# Altium PCB pphat.PcbDoc
Units mm, origin at the board's own origin, x right, y up, seen from the top; angles counter-clockwise.
Board outline 85 x 56 mm, 2 copper layers (Top Layer, Bottom Layer), stack 1.571 mm thick; 20 components, 13 nets, 111 pads, 8 vias.
Unrouted connection lines stored in the file: 29.
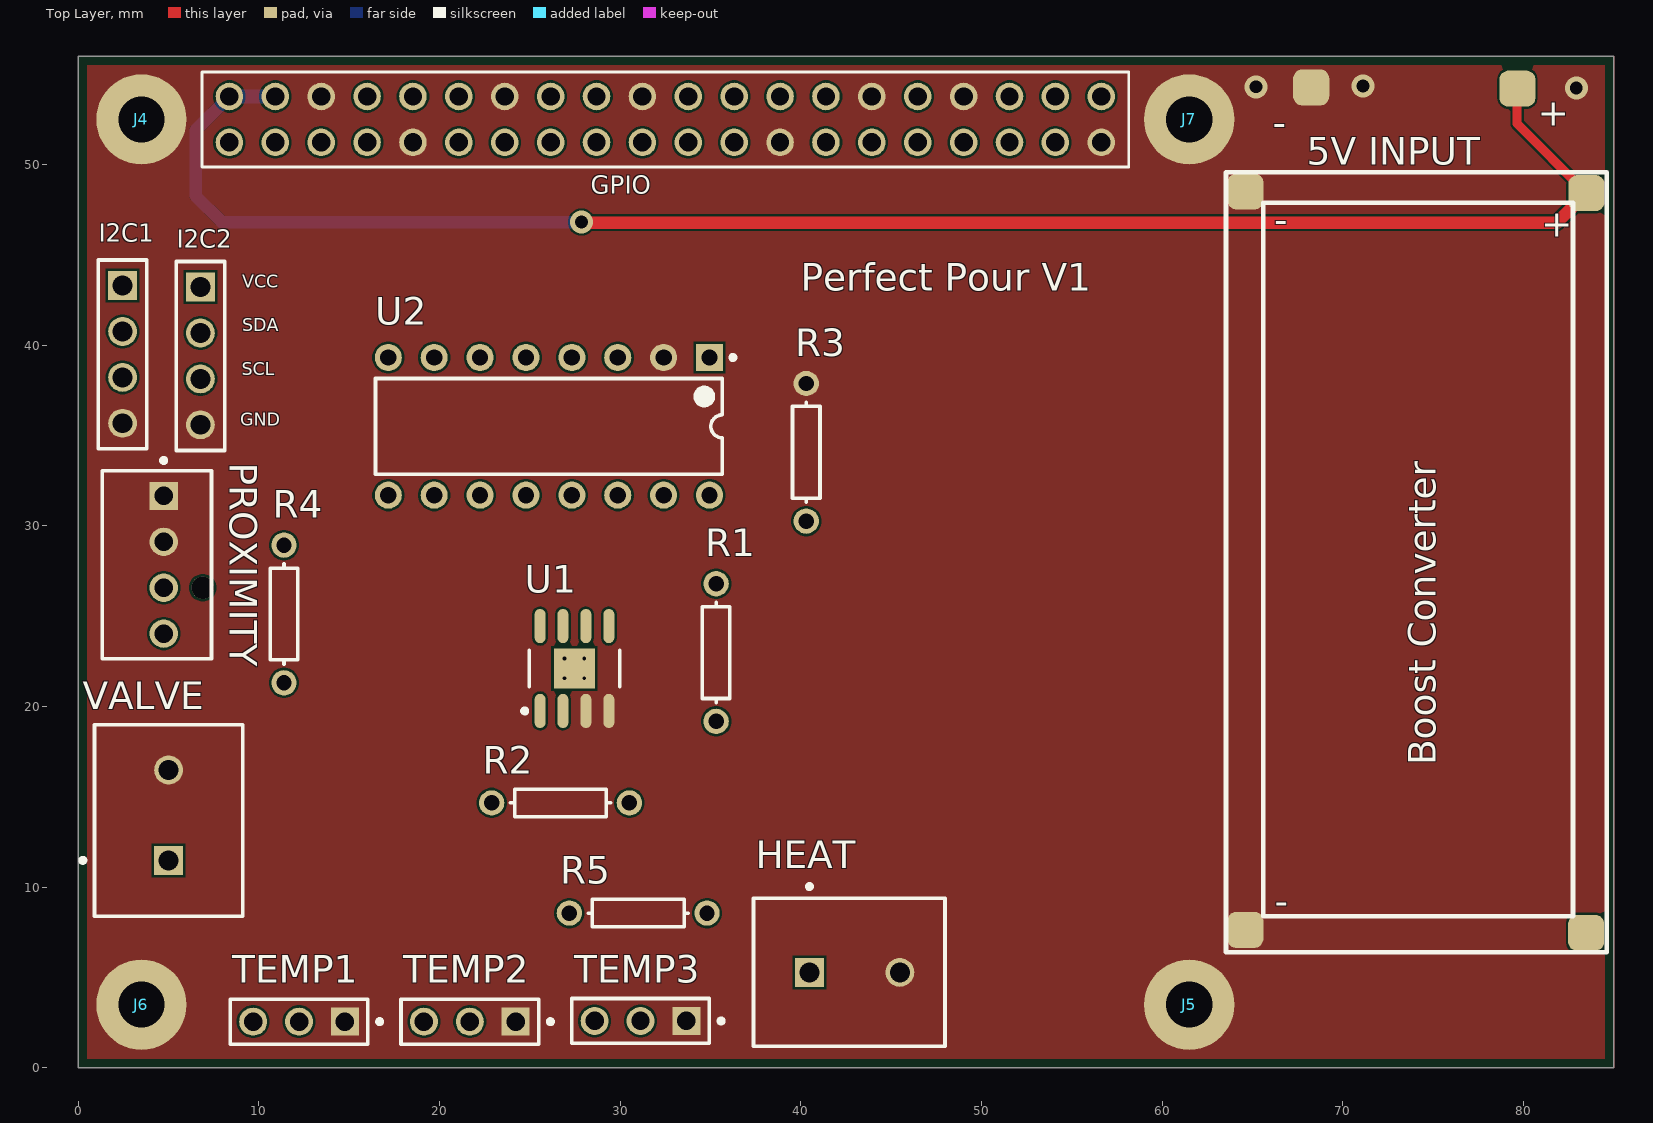
[diagram p0: Top Layer view]
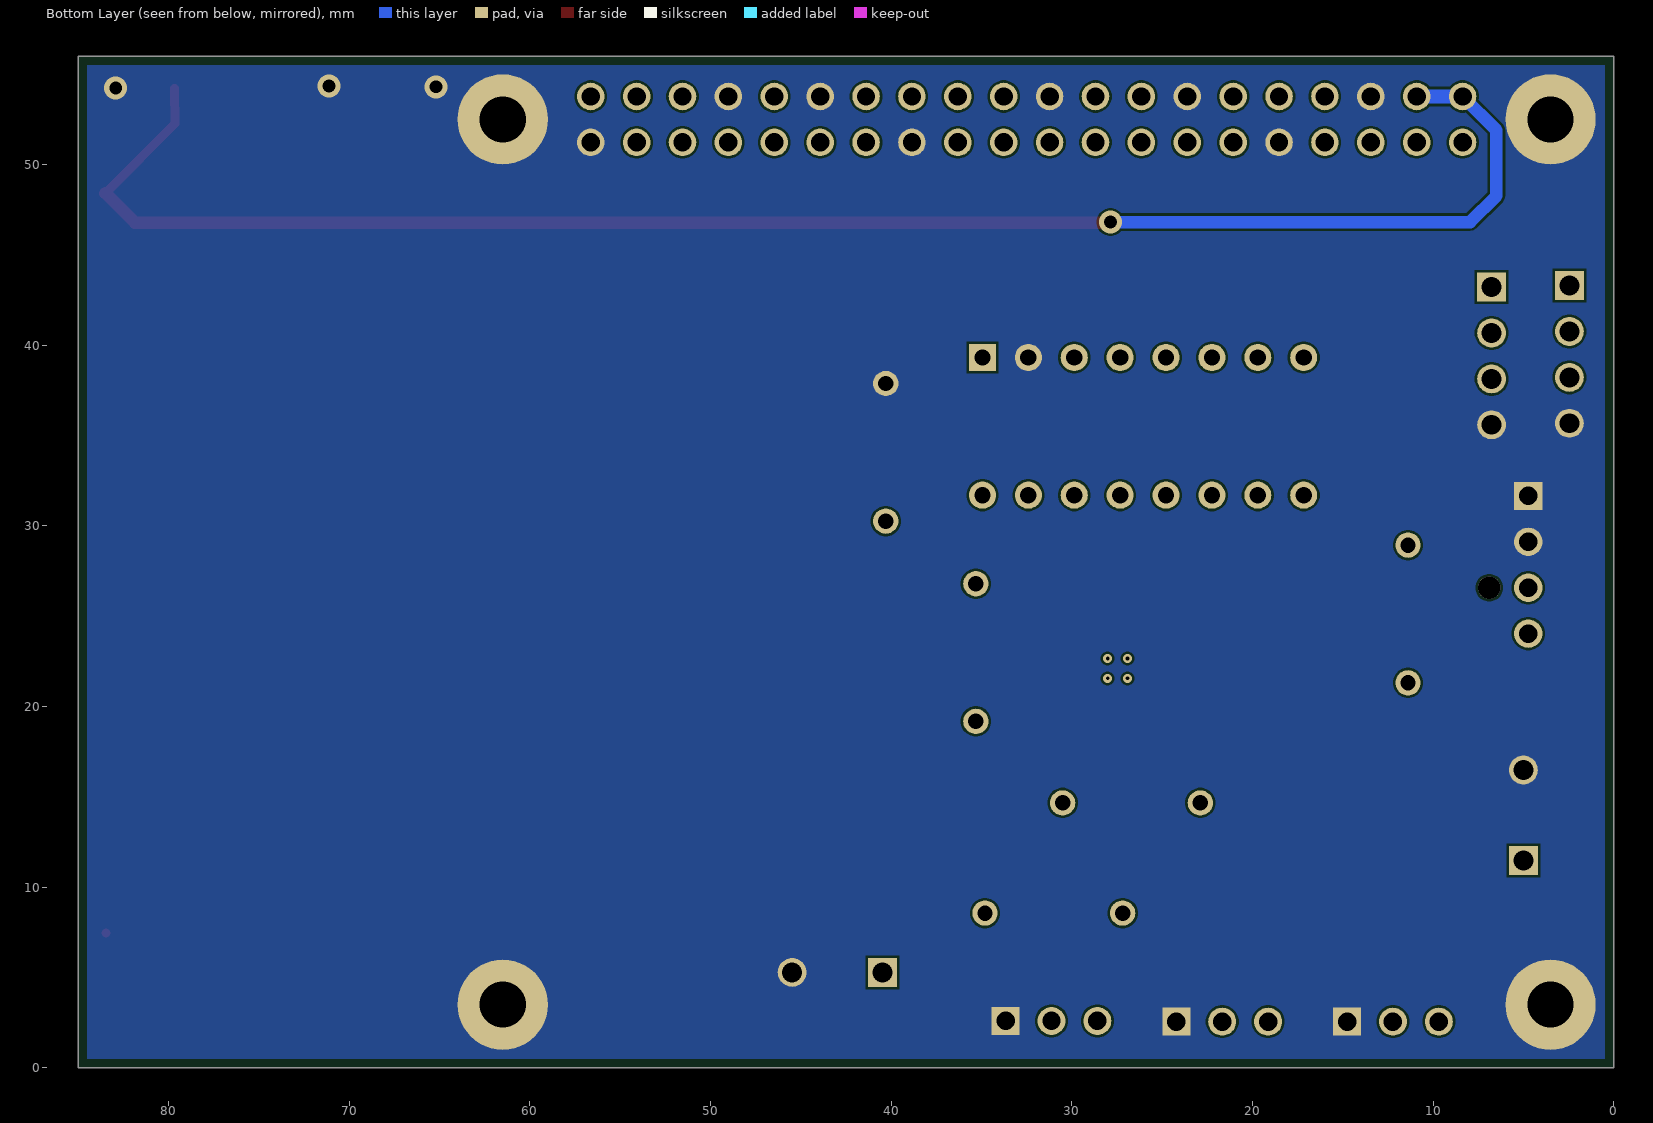
[diagram p1: Bottom Layer view, seen from below]

## Layer stack, top to bottom
Top Solder: solder mask 0.0102, Solder Resist, Dk 3.5
Top Layer: signal copper 0.0356
Dielectric3: core 1.5, Core-025, Dk 4.6
Bottom Layer: signal copper 0.0356
Bottom Solder: solder mask 0.0102, Solder Resist, Dk 3.5

## Board outline
0,0 0,56 85,56 85,0

## Design rules (kind name [scope] priority, off if disabled: settings)
BoardOutlineClearance [All] p1: gap=0.5 ignorepadtopadclearanceinfootprint=FALSE
Clearance "Board outline" [All vs OnLayer('Keep-Out Layer')] p1: gap=0 ignorepadtopadclearanceinfootprint=TRUE
Clearance Default [All] p2: gap=0.127 ignorepadtopadclearanceinfootprint=TRUE
ComponentClearance ComponentClearance_RS1 [InComponent('RS1') vs InComponent('L2')] p1: gap=0 collisioncheckmode=3 verticalgap=0 showdistances=FALSE
ComponentClearance ComponentClearance_J6 [InComponent('J6') vs InComponent('L4')] p2: gap=0 collisioncheckmode=3 verticalgap=0 showdistances=FALSE
ComponentClearance [All] p3: gap=0.25 collisioncheckmode=3 verticalgap=0.254 showdistances=FALSE
DiffPairsRouting [InDifferentialPairClass('All Differential Pairs')] p1: maxlimit=0.25 minlimit=0.127 mostfreqgap=0.243 toplayer_minwidth=0.075 toplayer_maxwidth=0.25 toplayer_prefwidth=0.25 bottomlayer_minwidth=0.075 bottomlayer_maxwidth=0.25 bottomlayer_prefwidth=0.25 impedanceprofiledriven=TRUE maxuncoupledlength=12.7
HoleSize [All] p1: absolutevalues=TRUE maxlimit=10 minlimit=0.254 maxpercent=80.000 minpercent=20.000
HoleToHoleClearance [All] p1: gap=0.1 allowstackedmicrovias=TRUE
MatchedLengths [All] p1: tolerance=1 checknetsindiffpair=TRUE checkdiffpairvsdiffpair=FALSE checkxsignals=FALSE checkothers=FALSE
MinimumSolderMaskSliver [All] p1: minsoldermaskwidth=0.1
PasteMaskExpansion [All] p1: expansion=-0.1
PolygonConnect [All] p1: connectstyle=Direct reliefconductorwidth=0.254 reliefentries=4 polygonreliefangle="90 Angle" airgapwidth=0.254
RoutingVias [All] p1: holewidth=0.254 width=0.508 viastyle="Through Hole" minholewidth=0.254 minwidth=0.508 maxholewidth=0.5 maxwidth=1
SilkToSilkClearance [All] p1 off: silktosilkclearance=0.254
SilkToSolderMaskClearance [IsPad] p1 off: minsilkscreentomaskgap=0.254 clearancetoexposedcopper=TRUE
SolderMaskExpansion [All] p1: expansion=0.05 istentingtop=FALSE
Width [All] p1: maxlimit=6.8 minlimit=0.127 preferedwidth=0.2 minimp=50.000000 maximp=50.000000 favimp=50.000000
22 further rules are at their usual default settings.

## Components (designator, comment, footprint, x,y, rotation, side; value= is the part's Value field where it differs from the comment)
GPIO "GPIO 2x20" GPIO2x20 32.5,52.5 r0 top locked
HEAT "282836-2" TECO-282836-2_V 42.979,5.287 r0 top
I2C1 "61300411121" 61300411121 2.459,39.492 r270 top
I2C2 "61300411121" 61300411121 6.761,39.408 r270 top
J4 "M2.5" "M2.5 Drill Hole" 3.5,52.5 r0 top locked
J5 "M2.5" "M2.5 Drill Hole" 61.5,3.5 r0 top locked
J6 "M2.5" "M2.5 Drill Hole" 3.5,3.5 r0 top locked
J7 "M2.5" "M2.5 Drill Hole" 61.5,52.5 r0 top locked
PROXIMITY "47053-3000" FP-47053-3000-MFG 4.355,27.849 r90 top
R1 "Res1" AXIAL-0.3 35.312,22.99 r90 top value=10K
R2 "Res1" AXIAL-0.3 26.699,14.667 r0 top value=10K
R3 "Res1" AXIAL-0.3 40.299,34.076 r90 top value=10K
R4 "Res1" AXIAL-0.3 11.39,25.126 r90 top value=10K
R5 "Res1" AXIAL-0.3 30.998,8.569 r0 top value=10K
TEMP1 "22-28-4033" MOLX-22-28-4033_V 12.225,2.559 r180 top
TEMP2 "22-28-4033" MOLX-22-28-4033_V 21.675,2.559 r180 top
TEMP3 "22-28-4033" MOLX-22-28-4033_V 31.126,2.598 r180 top
U1 "AD8099ARDZ" ADI-RD-8-1_L 27.469,22.109 r90 top
U2 "DAC0808LCN" NFG0016A 26.055,35.512 r270 top
VALVE "282836-2" TECO-282836-2_V 5.005,13.987 r90 top

## Footprints (in the part's own frame and the unit in brackets; to place one, negate y for a bottom-side part, rotate by r counter-clockwise, add the part's x,y. Pads: shape width x height; smd on the part's side, far side on the other; paste and mask are expansions set on the pad)
61300411121 [mm] "Pin Header, pitch 2.54 mm, THT, Vertical, single row, 4p"
  rect 1.6x1.6 hole 1.1: 1(-3.81,0)
  round 1.6 hole 1.1: 2(-1.27,0) 3(1.27,0) 4(3.81,0)
  silkscreen extent -5.23,-1.34 5.23,1.35, body extent -5.08,-1.27 5.08,1.27, height 8.57
ADI-RD-8-1_L [mm] "SOIC, 8-Leads, Body 4.9x3.9mm, Pitch 1.27mm, Thermal Pad 2.29x2.29mm, IPC High Density"
  oval 1.9x0.6 smd: 1(-2.35,1.905) 2(-2.35,0.635) 3(-2.35,-0.635) 4(-2.35,-1.905) 5(2.35,-1.905) 6(2.35,-0.635) 7(2.35,0.635) 8(2.35,1.905)
  rect 2.2x2.29 smd: 9(0,0)
  silkscreen extent -2.47,-2.5 1,2.88, body extent -2,-2.5 2,2.5, height 1.75
AXIAL-0.3 [mm] "Axial Device, Thru-Hole; 2 Leads; 0.3 in Pin Spacing"
  round 1.4 hole 0.85: 1(-3.81,0) 2(3.81,0)
  silkscreen extent -2.77,-0.76 2.77,0.76
FP-47053-3000-MFG [mm]
  rect 1.57x1.57 hole 1.02 paste-1000 mask+0: 1(3.81,-0.38)
  round 1.57 hole 1.02 paste-1000 mask+0: 2(1.27,-0.38) 3(-1.27,-0.38) 4(-3.81,-0.38)
  round 1.25 hole 1.25 unplated paste-1000 mask+0: ""(-1.27,-2.54)
  silkscreen extent -5.2,-3.02 5.9,3.02, body extent -5.3,-3.26 5.3,3.12, height 0.25
GPIO2x20 [mil]
  round 60 hole 40 mask+0: 1(-950,-50) 2(-950,50) 3(-850,-50) 4(-850,50) 5(-750,-50) 6(-750,50) 7(-650,-50) 8(-650,50) 9(-550,-50) 10(-550,50) 11(-450,-50) 12(-450,50) 13(-350,-50) 14(-350,50) 15(-250,-50) 16(-250,50) 17(-150,-50) 18(-150,50) 19(-50,-50) 20(-50,50) 21(50,-50) 22(50,50) 23(150,-50) 24(150,50) 25(250,-50) 26(250,50) 27(350,-50) 28(350,50) 29(450,-50) 30(450,50) 31(550,-50) 32(550,50) 33(650,-50) 34(650,50) 35(750,-50) 36(750,50) 37(850,-50) 38(850,50) 39(950,-50) 40(950,50)
  silkscreen extent -1010,-103 1010,104, body extent -950,-50 -940,-40, height 10
"M2.5 Drill Hole" [mm] "M2.5 Drill Hole, Free Fit"
  round 5 hole 2.55 unplated: ""(0,0)
MOLX-22-28-4033_V [mm] "THD, 3-Leads, Body 7.62x2.49mm, Pitch 2.54mm"
  rect 1.55x1.55 hole 1.02: 1(-2.54,0)
  round 1.55 hole 1.02: 2(0,0) 3(2.54,0)
  silkscreen extent -4.59,-1.24 3.81,1.24, body extent -3.81,-1.24 3.81,1.24, height 8.38
NFG0016A [mm] "DIP, 16-Leads, Body 19.2x6.6mm, Pitch 2.54mm"
  rect 1.5x1.5 hole 0.9: 1(-3.81,8.89)
  round 1.5 hole 0.9: 2(-3.81,6.35) 3(-3.81,3.81) 4(-3.81,1.27) 5(-3.81,-1.27) 6(-3.81,-3.81) 7(-3.81,-6.35) 8(-3.81,-8.89) 9(3.81,-8.89) 10(3.81,-6.35) 11(3.81,-3.81) 12(3.81,-1.27) 13(3.81,1.27) 14(3.81,3.81) 15(3.81,6.35) 16(3.81,8.89)
  silkscreen extent -3.93,-9.6 2.65,10.32, body extent -4.25,-9.52 4.25,9.53, height 4.08
TECO-282836-2_V [mm] "Female Header, Pitch 5mm, 1 x 2 Position, Height 10mm"
  rect 1.6x1.6 hole 1.1: 1(-2.5,0)
  round 1.6 hole 1.1: 2(2.5,0)
  silkscreen extent -5.6,-4.1 5,4.87, body extent -5.6,-4.1 5,4.1, height 10

## Part data
GPIO: library part CON_383, "Conn, GPIO 2x20", Manufacturer_Part_Number=2223, Mfr_Name="Adafruit Industries", Connections=40, Copyright="Copyright (C) 2022 Ultra Librarian. All rights reserved.", CreationDate=11/3/2021, Creator=W.Liao, DFC_index=CON_383, LeadFree=True, Mounting=TH, RefDes=RefDes, RoHS=True, Type=DEV
HEAT VALVE: library part CMP-1684-00017-1, "Female Header, Pitch 5 mm, 1 x 2 Position, Height 10 mm, Tail Length 3.5 mm, Rohs, Bulk", Color=Green, Current=13.5A, Manufacturer="TE Connectivity", Package Description="Female Header, Pitch 5 mm, 1 x 2 Position, Height 10 mm, Tail Length 3.5 mm", Package Reference=THD, Standard Package=300, Voltage=300V, 3D Model=282836-2.pdf, Category=Connectors,Interconnects, Clamp Material - Plating=Brass-NickelPlated, Contact Material - Plating=Brass-TinPlated, Datasheet URL=http://www.te.com.cn/commerce/DocumentDelivery/DDEController?Action=showdoc&DocId=Catalog+Section%7F1308389_EUROSTYLE_TERMINAL_BLOCKS%7F0607%7Fpdf%7FEnglish%7FENG_CS_1308389_EUROSTYLE_TERMINAL_BLOCKS_0607.pdf%7F282836-2, Dynamic Catalog=BuchananSeries, Family=TerminalBlocks-WiretoBoard, Featured Product=EurostyleTerminalBlockConnectors, Features=Interlocking(Side), Housing Material=Polyamide(PA66),Nylon6/6, Manufacturer URL=http://www.te.com, Mating Orientation=HorizontalwithBoard, Mounting Type=ThroughHole, Number of Levels=1, Other Names="5ULV-02B / A98076", Packaging=Bulk, Pitch="0.197\"(5.00mm)", Positions Per Level=2, Product Training Modules=Wire-to-BoardEurostyleTerminalBlocks, RoHS Information=282836-2StatementofCompliance, Screw Material - Plating=Brass-NickelPlated, Screw Thread=M3, Series=Buchanan, Torque - Screw=0.68Nm(6Lb-In), Wire Gauge=16-30AWG, Wire Termination=Screw-RisingCageClamp
I2C1 I2C2: library part CMP-1502-01064-1, "THT Vertical Pin Header WR-PHD, Pitch 2.54 mm, Single Row, 4 pins", Contact Resistance=20mOhm, Manufacturer="Wurth Elektronik", Operating Temperature=-40to105degC, Rated Current=3A, Withstanding Voltage=500VAC, Working Voltage=250VAC, Datasheet URL=https://katalog.we-online.de/em/datasheet/6130xx11121.pdf, Gender=Male, Manufacturer URL=http://www.we-online.de, Mounting Technology=THT, Orientation=Vertical, Package Reference=61300411121, Packaging=Bag, Part Number=61300411121, Pin Number=4, Pitch=2.54mm, Publisher=WurthElektronik, Row Number=Single
J4: library part "Mounting Hole", "Raspberry Pi Mounting Hole, M2.5", CreationDate=1/20/2022, Creator=W.Liao, DFC_index=CON_386, LeadFree=True, Mounting=TH, RoHS=True
J5 J6 J7: library part CON_386, "Raspberry Pi Mounting Hole, M2.5", CreationDate=1/20/2022, Creator=W.Liao, DFC_index=CON_386, LeadFree=True, Mounting=TH, RoHS=True
PROXIMITY: library part CMP-04776-000447-1, "CONN HEADER VERT 4POS 2.54MM", Current Rating=4A, Max Operating Temperature=75°C, Min Operating Temperature=0°C, Package Quantity=12000, Voltage Rating=250V, Contact Material="Copper Alloy", Contact Plating=Tin, Gender=Male, Glow Wire Compliant=Non-compliant, Halogen Free="Low Halogen", Mount="Through Hole", Number of Circuits=4, Number Of Contacts=4, Number of Positions=4, Number Of Rows=1, Orientation=Straight, Packaging=Bulk, Pitch=2.54mm, REACH SVHC="No SVHC", RoHS Compliant=Yes, Series=47053, Termination="Through Hole"
R1 R2 R3 R4 R5: "Resistor", LatestRevisionDate=17-Jul-2002, LatestRevisionNote="Re-released for DXP Platform.", PackageDescription="Axial Device, Thru-Hole; 2 Leads; 0.3 in Pin Spacing", PackageReference=AXIAL-0.3, Published=8-Jun-2000, Publisher="Altium Limited"
TEMP1 TEMP2 TEMP3: library part CMP-1676-00001-5, "Male Header, Pitch 2.54 mm, 1 x 3 Position, Height 8.38 mm, Tail Length 3.18 mm, RoHS, Bulk", Colour=Black, Current Rating="4 A", Manufacturer=Molex, Max Operating Temperature="75 degC", Min Operating Temperature="0 degC", Package Quantity=1, Voltage Rating="250 V", ComponentLink1Description="Manufacturer URL", ComponentLink1URL=http://www.molex.com/, ComponentLink2Description=Datasheet, ComponentLink2URL=http://www.molex.com/pdm_docs/sd/022284033_sd.pdf, Contact Finish=Gold, Contact Material=Brass, Contact Plating=Gold, DatasheetVersion="Rev. G, 01/2012", Height="8.38 mm", Lead Pitch="0.1 inch", Length="7.62 mm", Mount="Through Hole", Mounting Technology="Through Hole", PackageDescription="Male Header, Pitch 2.54 mm, 1 x 3 Position, Height 8.38 mm, Tail Length 3.18 mm", PackageReference=22-28-4033, Packaging=Bulk, Pins=3, REACH SVHC=Unknown, RoHSCompliant=true, Rows=1
U1: library part CMP-0384-01424-1, "Single Channel Ultra Low Noise Operational Amplifier, 500 MHz BW, 1.35 KV/us SR, Industrial, 8-pin SOIC (RD-8-1), Tube", Amplifiers Per Package=1, Generic Part Number=AD8099, Input Bias Current=3uA, Input Offset Voltage=100uV, Manufacturer="Analog Devices", Code_JEDEC=MS-012-AA, ComponentLink1Description="Manufacturer URL", ComponentLink1URL=http://www.analog.com/en/index.html, ComponentLink2Description=Datasheet, ComponentLink2URL=http://www.analog.com/static/imported-files/data_sheets/AD8099.pdf, ComponentLink3Description="Package Specification", ComponentLink3URL=http://www.analog.com/static/imported-files/packages/PKG_PDF/SOIC_ED(RD)/RD_8_1.pdf, DatasheetVersion="Rev. B", Iq/Amp=16mA, Mounting Technology="Surface Mount", PackageDescription="8-Pin Standard Small Outline Package, Body 4.9 x 3.9 mm, Pitch 1.27 mm", PackageReference=RD-8-1, PackageVersion=060506-A, PartNumber=AD8099ARDZ, Slew Rate=1.35KV/us, Small Signal Bandwidth=500MHz, V Span Max=12V, V Span Min=5V
U2: library part CMP-0061-00001-3, "8-Bit D/A Converter, 16-pin MDIP", Manufacturer="Texas Instruments", PackageTopMarking=NSUZXYYTTE#*DAC0808LCN*MC1408P8, PowerWise=N, Code_JEDEC=MS-001-BB, ComponentLink1Description="Datasheet URL", ComponentLink1URL=http://www.ti.com/general/docs/lit/getliterature.tsp?genericPartNumber=DAC0808&fileType=pdf, CompType="D/A Converter", PackageDescription="MDIP, .750 x .250 x .130in, 16 Lead, .100in Pitch", PackageReference=NFG0016A, PinCount=16, RoHS=N

## Free pads (board coordinates)
  rrect50% 2x2 smd: 1(64.604,7.637) 1(64.61,48.512) 1(68.252,54.273) 1(79.665,54.203) 1(83.471,7.474) 1(83.49,48.421)

## Via types
v1: diameter 0.5, hole 0.2, Top Layer to Bottom Layer, 4 vias
v2: diameter 1.27, hole 0.711, Top Layer to Bottom Layer, 4 vias

## Nets (pads, with @x,y where several pads share a name; then routed paths per layer and width w, separated by ;. In a path a pad name is that pad's centre, name@x,y a point inside that pad or via, vN(x,y) a via of type N, cw(c..) or ccw(c..) an arc to the next point about the centre after c; other vN are vias at no path point)
3V3: GPIO.1 R5.1 TEMP1.3 TEMP2.3 TEMP3.3
+5: GPIO.2 GPIO.4 I2C1.1 I2C2.1 pad.1@79.665,54.203 pad.1@83.49,48.421 PROXIMITY.4 R4.1 U1.8 U2.13 | length 94.5
  Top Layer w0.5: pad.1@79.665,54.203 79.647,52.264 pad.1@83.49,48.421
  Top Layer w0.7: v2@27.871,46.785 37.897,46.785 40.337,46.785 81.854,46.785 pad.1@83.49,48.421
  Bottom Layer w0.2: 9.694,46.817 9.708,46.803
  Bottom Layer w0.7: GPIO.2 6.502,51.902 6.502,48.267 7.952,46.817 9.694,46.817 v2(27.858,46.817)
  Bottom Layer w0.8: GPIO.2 GPIO.4
+12: pad.1@83.471,7.474 R1.1 U1.7
GND: GPIO.6 GPIO.9 GPIO.14 GPIO.20 GPIO.25 GPIO.30 GPIO.34 GPIO.39 HEAT.2 I2C1.4 I2C2.4 J4. J5. J6. J7. pad.1@64.61,48.512 pad.1@64.604,7.637 pad.1@68.252,54.273 PROXIMITY.1 PROXIMITY.2 R3.2 TEMP1.1 TEMP2.1 TEMP3.1 U1.3 U1.4 U2.2 VALVE.2
  other v2: 82.925,54.249 65.198,54.307 71.119,54.352
GPIO22: GPIO.15 HEAT.1
GPIO27: GPIO.13 PROXIMITY.3 R4.2
NetR1_2: R1.2 U2.14
NetR2_1: R2.1 U1.1
NetR2_2: R2.2 U1.2 U2.4
NetR3_1: R3.1 U2.15
NetU1_6: U1.6 VALVE.1
SCL: GPIO.5 I2C1.3 I2C2.3 R5.2 TEMP1.2 TEMP2.2 TEMP3.2
SDA: GPIO.3 I2C1.2 I2C2.2
pads on no net: GPIO.7 GPIO.8 GPIO.10 GPIO.11 GPIO.12 GPIO.16 GPIO.17 GPIO.18 GPIO.19 GPIO.21 GPIO.22 GPIO.23 GPIO.24 GPIO.26 GPIO.27 GPIO.28 GPIO.29 GPIO.31 GPIO.32 GPIO.33 GPIO.35 GPIO.36 GPIO.37 GPIO.38 GPIO.40 PROXIMITY. U1.5 U1.9 U2.1 U2.3 U2.5 U2.6 U2.7 U2.8 U2.9 U2.10 U2.11 U2.12 U2.16
copper on no net: | length 0.5
  Top Layer w0.2: 15.519,51.23 15.99,51.23
  other v1: 26.919,21.559 28.019,21.559 26.919,22.659 28.019,22.659

## Polygon pours and split planes (outlines as drawn)
GND on Top Layer "NONET_L-01_P-001" (solid, remove dead copper, pour order 8): 0,56 85,56 85,0 0,0
no net on Top Layer "NONET_L01_P006" (solid, pour order 6): 85,56 85,0
GND on Bottom Layer "NONET_L-01_P-001" (solid, remove dead copper, pour order 7): 0,56.5 85.6,56.5 85.6,0 0,0

## Silkscreen, mask and mechanical layers (free items; w line width, h text height)
Top Overlay:
  lines w0.254: 63.534,6.392 84.616,6.392 84.616,49.572 63.534,49.572 63.534,6.392 ; 65.599,8.386 82.744,8.386 82.744,47.883 65.599,47.883 65.599,8.386
  text "+" at 80.791,52.144 h1.52
  text "-" at 66.129,51.575 h1.52
  text "5V INPUT" at 68.014,50.001 h1.52
  text "-" at 66.202,46.203 h1.52
  text "+" at 80.996,46.016 h1.52
  text "VCC" at 9.073,43.18 h0.7
  text "Perfect Pour V1" at 40.007,43.024 h1.52
  text "SDA" at 9.073,40.778 h0.7
  text "SCL" at 9.042,38.346 h0.7
  text "GND" at 8.98,35.54 h0.7
  text "Boost Converter" at 75.142,16.765 h1.52 r90
  text "-" at 66.24,8.485 h1.52
Mechanical 16:
  the board outline again, w0.001